# Altium PCB HV_DCDC.PcbDoc
Units mil, origin at the board's own origin, x right, y up, seen from the top; angles counter-clockwise.
Board outline 6000 x 4000 mil, 2 copper layers (Top Layer, Bottom Layer); 25 components, 72 nets, 127 pads, 14 vias.
Unrouted connection lines stored in the file: 42.
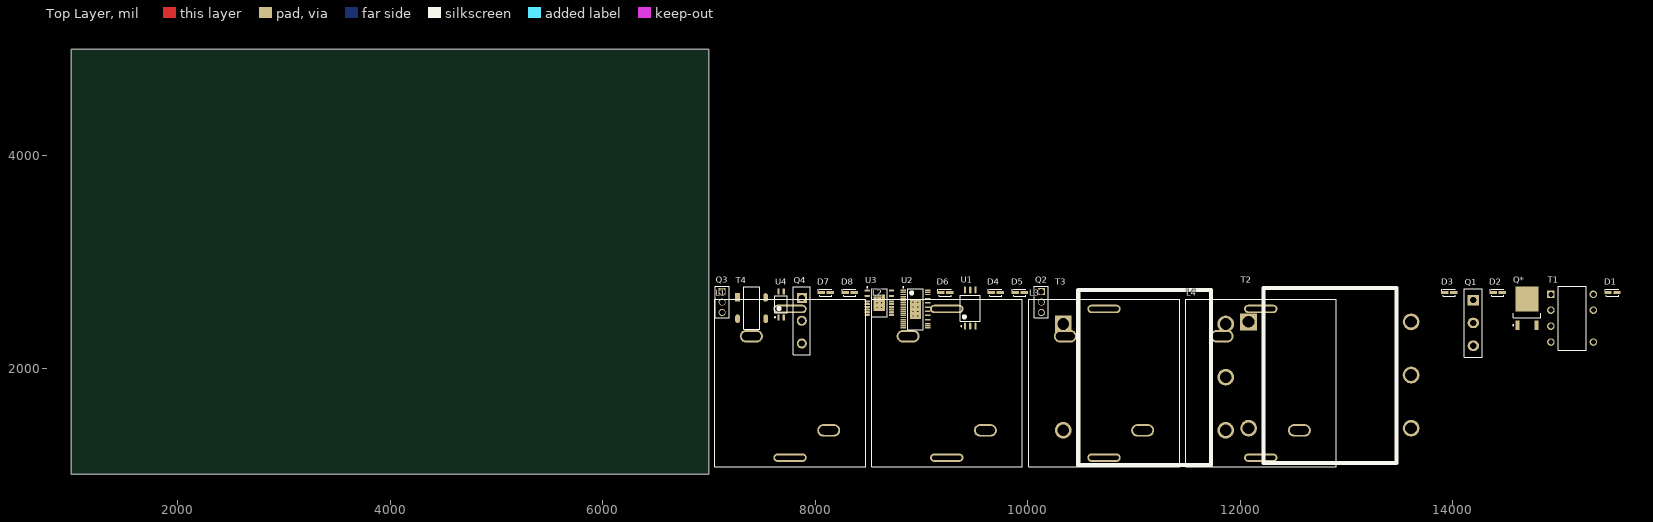
[diagram p0: Top Layer view]
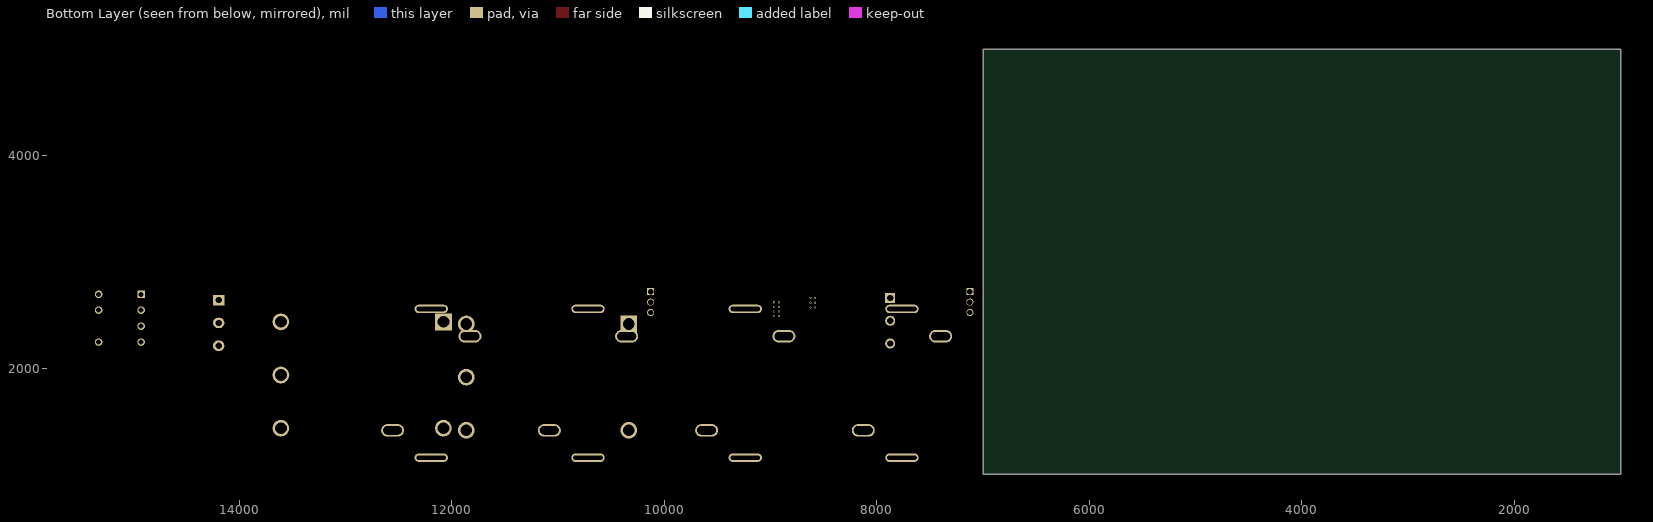
[diagram p1: Bottom Layer view, seen from below]

## Layer stack, top to bottom
Top Solder: solder mask 0.4, Solder Resist, Dk 3.5
Top Layer: signal copper 1.4
Dielectric 1: dielectric 12.6, FR-4, Dk 4.8
Bottom Layer: signal copper 1.4
Bottom Solder: solder mask 0.4, Solder Resist, Dk 3.5

## Board outline
1000,1000 7000,1000 7000,5000 1000,5000

## Design rules (kind name [scope] priority, off if disabled: settings)
Clearance [All] p1: gap=10 ignorepadtopadclearanceinfootprint=FALSE except(0: Arc-Hole Track-Hole SMDPad-Hole THPad-Hole Via-Hole Fill-Hole Poly-Hole Region-Hole Text-Hole)
PolygonConnect [All] p1: connectstyle=Relief reliefconductorwidth=10 reliefentries=4 polygonreliefangle="90 Angle" airgapwidth=10
RoomDefinition Main [InComponentClass('Main')] p1: confinementstyle=ConfineIn formatcopy=TRUE lockcomponents=FALSE outline 220,110 2220,110 2220,1110 220,1110
RoutingVias [All] p1: holewidth=28 width=50 viastyle="Through Hole" minholewidth=28 minwidth=50 maxholewidth=28 maxwidth=50
SolderMaskExpansion [All] p1: expansion=4 istentingtop=FALSE
Width [All] p1: maxlimit=10 minlimit=10 preferedwidth=10
30 further rules are at their usual default settings.

## Components (designator, comment, footprint, x,y, rotation, side; value= is the part's Value field where it differs from the comment)
D1 "BAT46WH" DIOM2715X18N 15505,2710 r0 top
D2 "BAT46WH" DIOM2715X18N 14425,2710 r0 top
D3 "BAT46WH" DIOM2715X18N 13970,2710 r0 top
D4 "BAT46WH" DIOM2715X18N 9700,2710 r0 top
D5 "BAT46WH" DIOM2715X18N 9925,2710 r0 top
D6 "BAT46WH" DIOM2715X18N 9225,2710 r0 top
D7 "BAT46WH" DIOM2715X18N 8100,2710 r0 top
D8 "BAT46WH" DIOM2715X18N 8325,2710 r0 top
L1 "AGP4233-153ME" "AGP4233-153ME Landing Pattern" 7400,2300 r0 top
L2 "P4233-153ME" "AGP4233-153ME Landing Pattern" 8875,2300 r0 top
L3 "AGP4233-153ME" "AGP4233-153ME Landing Pattern" 10355,2300 r0 top
L4 "AGP4233-153ME" "AGP4233-153ME Landing Pattern" 11830,2300 r0 top
Q1 "IXFK240N25X3" TO-264-3 14195,2640 r0 top
Q2 "STF7N105K5" TO-220-3 10130,2720 r0 top
Q3 "IPP019N08NF2SAKMA1" TO-220-3 7125,2720 r0 top
Q4 "UJ3C120150K3S" TO-247-3 7875,2660 r0 top
Q* "STD2NK100Z" "DPAK TO-252" 14700,2565 r90 top
T1 "750817020" "750817020 Transformer" 14925,2695 r0 top
T2 "R41-AC-2202" "R41-AC-2202 Landing Pattern" 12080,2435 r0 top
T3 "R41-AC-2202" "R41-AC-2202 Landing Pattern" 10335,2415 r0 top
T4 "PE-68386NLT" "PE-68386NL Landing Pattern" 7270,2665 r0 top
U1 "ACPL-P346-000E" "SOP-6 Stretched" 9460,2565 r90 top
U2 "LT3752EFE-1#PBF" TSSOP127P600-8N 8945,2555 r0 top
U3 "LT8311EFE#PBF" "TSSOP 20 Lead LT8311" 8605,2615 r0 top
U4 "PS2801C-1-V-F3-A" SSOP127P700X200-4L 7680,2600 r90 top

## Footprints (in the part's own frame and the unit in brackets; to place one, negate y for a bottom-side part, rotate by r counter-clockwise, add the part's x,y. Pads: shape width x height; smd on the part's side, far side on the other; paste and mask are expansions set on the pad)
"750817020 Transformer" [mm]
  rect 1.8x1.8 hole 1.2: 1(0,0)
  round 1.8 hole 1.2: 2(0,-3.81) 3(0,-7.62) 4(0,-11.43) 5(10.16,-11.43) 7(10.16,-3.81) 8(10.16,0)
  silkscreen extent 1.73,-13.33 8.43,1.91
"AGP4233-153ME Landing Pattern" [mm] "Coilcraft AGP4233 Series 6.8uH-150uH"
  oval 8x2 hole 1 slot 7 at 0 deg: 0(9.25,-29.03) 0(9.25,6.53)
  oval 5.5x3 hole 2 slot 4.5 at 0 deg: 1(0,0) 2(18.5,-22.5)
  silkscreen extent -8.7,-31.2 27.3,8.8
DIOM2715X18N [mm] "Molded Diode, 2-Leads, Body 2,70x1,55mm, IPC Medium Density"
  rect 1.75x0.7 smd: 1(-1.075,0) 2(1.075,0)
  silkscreen extent -1.9,-0.85 1.45,0.85, body extent -1.65,-0.85 1.65,0.85, height 1.8
"DPAK TO-252" [mm] "DPAK High density"
  rect 2.3x0.95 smd: 1(-4.1,2.29) 2(-4.1,-2.29)
  rect 6x5.45 smd: 3(2.2,0)
  silkscreen extent -4.22,-3.3 -1.2,3.44, body extent -2.35,-3.3 3.85,3.3, height 2.4
"PE-68386NL Landing Pattern" [mil]
  rect 45x80 smd: 1(0,0)
  oval 45x80 smd: 3(0,-200) 4(265,-200) 6(265,0)
  silkscreen extent 58,-300 208,100
"R41-AC-2202 Landing Pattern" [mm]
  rect 4x4 hole 2.8: 1(0,0)
  round 4 hole 2.8: 5(0,-25.4) 6(38.85,-25.4) 7(38.85,-12.7) 8(38.85,0)
  silkscreen extent 3.6,-33.7 35.35,8.1
"SOP-6 Stretched" [mm] "ACPL-P346"
  oval 1.65x0.55 smd: 1(-4.325,1.27) 2(-4.325,0) 3(-4.325,-1.27) 4(4.325,-1.27) 5(4.325,0) 6(4.325,1.27)
  silkscreen extent -4.45,-2.4 3.1,2.4, body extent -3.5,-2.4 3.5,2.4, height 3.3
SSOP127P700X200-4L [mm] "SSOP, 4-Leads, Body 2,70x4,40mm, Pitch 1,27mm, IPC High Density"
  rect 1.4x0.55 smd: 1(-3.1,0.635) 2(-3.1,-0.635) 3(3.1,-0.635) 4(3.1,0.635)
  silkscreen extent -3.22,-1.5 2,1.58, body extent -2.2,-1.5 2.2,1.5, height 2
TO-220-3 [mm]
  rect 1.7x1.7 hole 1.3: 1(0,0)
  round 1.7 hole 1.3: 2(0,-2.5) 3(0,-5)
  silkscreen extent -1.68,-6.25 1.68,1.25
TO-247-3 [mm]
  rect 2.4x2.4 hole 1.5: 1(0,0)
  round 2.4 hole 1.5: 2(0,-5.44) 3(0,-10.88)
  silkscreen extent -2.03,-13.6 2.03,2.72
TO-264-3 [mm]
  rect 2.7x2.5 / inner rect 2.5x2.5 / far side rect 2.7x2.5 hole 1.5: 1(0,0)
  oval 2.7x2.5 / inner round 2.5 / far side oval 2.7x2.5 hole 1.5: 2(0,-5.46) 3(0,-10.92)
  silkscreen extent -2.18,-13.65 2.18,2.73
TSSOP127P600-8N [mm] "TSSOP 38 Lead LT 3752-1 w. missing Leads for Spacing"
  rect 1.25x0.35 smd: 1(-2.925,4.5) 2(-2.925,4) 3(-2.925,3.5) 4(-2.925,3) 5(-2.925,2.5) 6(-2.925,2) 7(-2.925,1.5) 8(-2.925,1) 9(-2.925,0.5) 10(-2.925,0) 11(-2.925,-0.5) 12(-2.925,-1) 13(-2.925,-1.5) 14(-2.925,-2) 15(-2.925,-2.5) 16(-2.925,-3) 17(-2.925,-3.5) 18(-2.925,-4) 19(-2.925,-4.5) 20(2.925,-4.5) 21(2.925,-4) 22(2.925,-3.5) 24(2.925,-2.5) 26(2.925,-1.5) 28(2.925,-0.5) 30(2.925,0.5) 32(2.925,1.5) 34(2.925,2.5) 36(2.925,3.5) 37(2.925,4) 38(2.925,4.5)
  rect 2.74x4.75 smd: 39(0,0)
  silkscreen extent -3.05,-4.9 1.9,5.35, body extent -2.25,-4.9 2.25,4.9, height 1.2
"TSSOP 20 Lead LT8311" [mm] "TSSOP 20 Lead LT8311 with missing pins for clearance"
  oval 1.3x0.5 smd: 1(-2.9,2.925) 3(-2.9,1.625) 5(-2.9,0.325) 6(-2.9,-0.325) 7(-2.9,-0.975) 8(-2.9,-1.625) 9(-2.9,-2.275) 10(-2.9,-2.925) 11(2.9,-2.925) 12(2.9,-2.275) 13(2.9,-1.625) 14(2.9,-0.975) 15(2.9,-0.325) 16(2.9,0.325) 18(2.9,1.625) 20(2.9,2.925)
  rect 2.74x3.86 smd: 21(0,0)
  silkscreen extent -3.02,-3.3 1.85,3.85, body extent -2.25,-3.3 2.25,3.3, height 1.2

## Part data
L1 L3 L4: "Power inductor, shielded, 20% tol, RoHS, halogen-free", Case/Package=Radial, DC Resistance (DCR)=2.95mR, Inductance=15uH, Inductance Tolerance=20%, Manufacturer=Coilcraft, RMS Current (Irms)=34A, Saturation Current=45A, Category=Inductors, ComponentLink1Description=http://www.farnell.com/datasheets/2017963.pdf?src-supplier=Element14, ComponentLink1URL=http://www.farnell.com/datasheets/2017963.pdf?src-supplier=Element14, Manufacturer Part Number=AGP4233-153ME, Pricing 1="1=15,62000, 10=15,61000, 50=15,61000, 100=15,61000, 1000=11,98000, 10000=11,98000 (USD)", REACH SVHC=Unknown, RoHS=Yes, RoHS Compliant=Yes, Stock 1=17, Supplier 1=Mouser
L2: library part AGP4233-153ME, "Power inductor, shielded, 20% tol, RoHS, halogen-free", Case/Package=Radial, DC Resistance (DCR)=2.95mR, Inductance=15uH, Inductance Tolerance=20%, Manufacturer=Coilcraft, RMS Current (Irms)=34A, Saturation Current=45A, Category=Inductors, ComponentLink1Description=http://www.farnell.com/datasheets/2017963.pdf?src-supplier=Element14, ComponentLink1URL=http://www.farnell.com/datasheets/2017963.pdf?src-supplier=Element14, Manufacturer Part Number=AGP4233-153ME, Pricing 1="1=15,62000, 10=15,61000, 50=15,61000, 100=15,61000, 1000=11,98000, 10000=11,98000 (USD)", REACH SVHC=Unknown, RoHS=Yes, RoHS Compliant=Yes, Stock 1=17, Supplier 1=Mouser
Q1: "Mosfet N-ch 250V 240A TO264", Manufacturer=IXYS, Manufacturer Part Number=IXFK240N25X3, Pricing 1="1=30,00000, 10=27,67000, 50=25,40000, 100=24,04000, 1000=24,04000, 10000=24,04000 (USD)", RoHS=No, Stock 1=7, Supplier 1=Mouser
Q2: "N-channel 1050 V, 1.4 Ohm typ., 4 A MDmesh K5 Power MOSFETs in TO-220FP package", Case/Package=TO-220-3, Continuous Drain Current (ID)=4A, Drain to Source Voltage (Vdss)=1.05kV, Input Capacitance=380pF, Manufacturer=STMicroelectronics, Max Operating Temperature=150°C, Max Power Dissipation=25W, Min Operating Temperature=-55°C, Category=MOSFETs, ComponentLink1Description=http://www.mouser.com/ds/2/389/stf7n105k5-955843.pdf?src-supplier=Mouser, ComponentLink1URL=http://www.mouser.com/ds/2/389/stf7n105k5-955843.pdf?src-supplier=Mouser, ComponentLink2Description=http://www.st.com/content/ccc/resource/technical/document/datasheet/26/20/d1/f7/b4/c1/4c/55/DM00112886.pdf/files/DM00112886.pdf/jcr:content/translations/en.DM00112886.pdf?src-supplier=Digi-Key, ComponentLink2URL=http://www.st.com/content/ccc/resource/technical/document/datasheet/26/20/d1/f7/b4/c1/4c/55/DM00112886.pdf/files/DM00112886.pdf/jcr:content/translations/en.DM00112886.pdf?src-supplier=Digi-Key, ComponentLink3Description=http://www.st.com/st-web-ui/static/active/en/resource/technical/document/datasheet/DM00112886.pdf?src-supplier=Avnet, ComponentLink3URL=http://www.st.com/st-web-ui/static/active/en/resource/technical/document/datasheet/DM00112886.pdf?src-supplier=Avnet, ComponentLink4Description=http://www.farnell.com/datasheets/2371890.pdf?src-supplier=Newark, ComponentLink4URL=http://www.farnell.com/datasheets/2371890.pdf?src-supplier=Newark, Lead Free="Lead Free", Manufacturer Part Number=STF7N105K5, Mount="Through Hole", Packaging=Rail/Tube, Pricing 1="1=3,16000, 10=2,71000, 100=2,16000, 500=1,87000, 1000=1,61000 (USD)", Rds On Max=2R, RoHS=Yes, RoHS Compliant=Yes, Stock 1=996, Supplier 1=Newark
Q3: "Transistor Power MOSFET N-Channel 80V 191A 3-Pin TO-220 Tube", Manufacturer=Infineon, Category=Uncategorized, Manufacturer Part Number=IPP019N08NF2SAKMA1, Pricing 1="1=3,34000, 10=2,99500, 100=2,45420, 500=2,09760 (USD)", RoHS=No, Stock 1=760, Supplier 1=Digi-Key
Q4: "Sicfet N-ch 1200V 18.4A TO247-3", Manufacturer=UnitedSiC, Manufacturer Part Number=UJ3C120150K3S, Pricing 1="1=9,16000, 10=8,28000, 50=7,90000, 100=7,90000, 1000=5,96000, 10000=5,15000 (USD)", RoHS=No, Stock 1=697, Supplier 1=Mouser
Q*: "N-channel 1000 V, 6.25 Ohm typ., 1.85 A, Zener-protected SuperMESH Power MOSFET in DPAK package", Case/Package=DPAK, Continuous Drain Current (ID)=1.85A, Drain to Source Breakdown Voltage=1kV, Drain to Source Resistance=8.5R, Gate to Source Voltage (Vgs)=30V, Input Capacitance=499pF, Manufacturer=STMicroelectronics, Max Operating Temperature=150°C, Max Power Dissipation=70W, Min Operating Temperature=-55°C, Package Quantity=2500, Threshold Voltage=3.75V, Category=MOSFETs, ComponentLink1Description=https://datasheet.ciiva.com/8025/1561863-8025045.pdf?src-supplier=Element14, ComponentLink1URL=https://datasheet.ciiva.com/8025/1561863-8025045.pdf?src-supplier=Element14, ComponentLink2Description=https://datasheet.ciiva.com/25625/0900766b810e895b-25625259.pdf?src-supplier=RSComponents, ComponentLink2URL=https://datasheet.ciiva.com/25625/0900766b810e895b-25625259.pdf?src-supplier=RSComponents, ComponentLink3Description=https://datasheet.ciiva.com/938/cd00159991-938647.pdf?src-supplier=Digi-Key, ComponentLink3URL=https://datasheet.ciiva.com/938/cd00159991-938647.pdf?src-supplier=Digi-Key, ComponentLink4Description=https://datasheet.ciiva.com/6380/cd00159991-6380217.pdf?src-supplier=Digi-Key, ComponentLink4URL=https://datasheet.ciiva.com/6380/cd00159991-6380217.pdf?src-supplier=Digi-Key, ComponentLink5Description=https://datasheet.ciiva.com/16220/cd00159991-16220233.pdf?src-supplier=Future+Electronics, ComponentLink5URL=https://datasheet.ciiva.com/16220/cd00159991-16220233.pdf?src-supplier=Future+Electronics, ComponentLink6Description=https://datasheet.ciiva.com/6380/cd00159991-6380219.pdf?src-supplier=Digi-Key, ComponentLink6URL=https://datasheet.ciiva.com/6380/cd00159991-6380219.pdf?src-supplier=Digi-Key, Contact Plating=Tin,Matte, Drain to Source Voltage (Vdss)=1kV, Drain-source On Resistance-Max=8.5R, Element Configuration=Single, Height=2.4mm, Lead Free="Lead Free", Length=6.6mm, Manufacturer Part Number=STD2NK100Z, Mount="Surface Mount", Number of Elements=1, Number of Pins=3, On-State Resistance=8.5R, Packaging="Tape and Reel", Polarity=N-CHANNEL, Power Dissipation=70W, Pricing 1="1=2,45000, 10=2,19600, 100=1,76550, 500=1,45048, 1000=1,31862 (USD)", Radiation Hardening=No, Rds On Max=8.5R, REACH SVHC="No SVHC", RoHS=Yes, RoHS Compliant=Yes, Series=SuperMESH™, Stock 1=2365, Supplier 1=Digi-Key, Turn-Off Delay Time=41.5ns, Turn-On Delay Time=7.2ns, Width=6.2mm
T1: "WE Transformer"
T2 T3: "High Voltage Transformer"
T4: "Pulse Transformer 1: 1 1500VDC 0.6Ohm Prim. DCR 0.6Ohm Sec. DCR 6 Terminal SMD Automotive", DC Resistance (DCR)=600mR, Manufacturer=Pulse, Max Operating Temperature=130°C, Min Operating Temperature=-40°C, Package Quantity=1500, Category=Transformers, ComponentLink1Description=https://datasheet.ciiva.com/29632/spm2007-61-29632613.pdf?src-supplier=Digi-Key, ComponentLink1URL=https://datasheet.ciiva.com/29632/spm2007-61-29632613.pdf?src-supplier=Digi-Key, ComponentLink2Description=https://datasheet.ciiva.com/29632/+spm2007-61-29632614.pdf?src-supplier=Digi-Key, ComponentLink2URL=https://datasheet.ciiva.com/29632/+spm2007-61-29632614.pdf?src-supplier=Digi-Key, ComponentLink3Description=https://datasheet.ciiva.com/2939/+spm2007-61-2939805.pdf?src-supplier=Digi-Key, ComponentLink3URL=https://datasheet.ciiva.com/2939/+spm2007-61-2939805.pdf?src-supplier=Digi-Key, Depth=8.64mm, Height=2.5mm, Length=6.73mm, Manufacturer Part Number=PE-68386NLT, Mount="Surface Mount", Number of Pins=6, Packaging="Tape and Reel", Pricing 1="1=2,70000, 10=2,16000, 25=1,75520, 50=1,71000, 100=1,66500, 250=1,62000, 500=1,60650 (USD)", Primary Impedance=600mR, Radiation Hardening=No, RoHS=Yes, RoHS Compliant=Yes, Secondary Impedance=600mR, Shielding=Unshielded, Stock 1=13846, Supplier 1=Digi-Key, Termination=SMD/SMT, Turns Ratio=1:1, Weight=0.009877oz, Width=6.7mm
U1: "Logic IC Output Optocoupler, 1-Element, 3750V Isolation", Case/Package=SOIC, Forward Current=4mA, Forward Voltage=1.55V, High Level Output Current=2A, Input Current=11mA, Isolation Voltage=3.75kV, Manufacturer="Broadcom Avago", Max Input Current=25mA, Max Operating Temperature=105°C, Max Output Current=2.5A, Max Power Dissipation=550mW, Min Operating Temperature=-40°C, Operating Supply Voltage=20V, Output Current=1A, Package Quantity=100, Approvals=CSA,UR,UL,IEC, Category=Optocouplers, Fall Time=8ns, Low Level Output Current=2A, Manufacturer Part Number=ACPL-P346-000E, Mount="Surface Mount", Number of Channels=1, Number of Pins=6, Output Voltage=20V, Packaging=Rail/Tube, Pricing 1="1=5,00000, 10=3,53300, 100=2,89340, 500=2,43922, 1000=2,38050 (USD)", Propagation Delay=120ns, Pulse Width Distortion (PWD)=50ns, Radiation Hardening=No, REACH SVHC="No SVHC", Rise Time=8ns, RoHS=Yes, RoHS Compliant=Yes, Stock 1=1063, Supplier 1=Digi-Key, Turn-On Delay Time=120ns
U2: "Current Mode PWM Controller 100kHz to 500kHz Automotive 31-Pin TSSOP EP Tube", Case/Package=TSSOP, Frequency=500kHz, Manufacturer="Analog Devices / Linear Technology", Max Operating Temperature=125°C, Max Supply Voltage=16V, Min Operating Temperature=-40°C, Min Supply Voltage=10.5V, Supplier Part Number 1=LT3752EFE-1#PBF-ND, Category="Voltage Regulators - Switching", Clock Sync=Yes, ComponentLink1Description=https://datasheet.ciiva.com/46429/1841069-46429096.pdf?src-supplier=Element14, ComponentLink1URL=https://datasheet.ciiva.com/46429/1841069-46429096.pdf?src-supplier=Element14, Manufacturer Part Number=LT3752EFE-1#PBF, Max Duty Cycle=95%, Number of Output Phases=1, Number of Outputs=1, Number of Pins=38, Packaging=Rail/Tube, Pricing 1="1=8,12000, 10=7,33800, 25=6,99720, 100=6,07550, 250=5,80244, 500=5,31300 (USD)", REACH SVHC="No SVHC", RoHS=Yes, RoHS Compliant=Yes, Stock 1=108, Supplier 1=Digi-Key, Switching Frequency=500kHz, Synchronous Rectifier=Yes, Topology="Forward Converter"
U3: "LT8311 - Synchronous Rectifier Controller with Opto-Coupler Driver for Forward Converters", Case/Package=TSSOP, Manufacturer="Analog Devices / Linear Technology", Max Operating Temperature=150°C, Max Supply Voltage=30V, Min Operating Temperature=-40°C, Min Supply Voltage=3.7V, Operating Supply Current=4.5mA, Package Quantity=74, Category="Gate Drivers", ComponentLink1Description=https://datasheet.ciiva.com/46423/1810721-46423691.pdf?src-supplier=Element14, ComponentLink1URL=https://datasheet.ciiva.com/46423/1810721-46423691.pdf?src-supplier=Element14, ComponentLink2Description=https://datasheet.ciiva.com/29699/44625-29699311.pdf?src-supplier=Digi-Key, ComponentLink2URL=https://datasheet.ciiva.com/29699/44625-29699311.pdf?src-supplier=Digi-Key, Manufacturer Part Number=LT8311EFE#PBF, Mount="Surface Mount", Number of Pins=20, Packaging=Rail/Tube, Pricing 1="1=7,34000, 10=6,63200, 25=6,32360, 100=5,49060, 250=5,24384, 500=4,80150 (USD)", REACH SVHC="No SVHC", RoHS=Yes, RoHS Compliant=Yes, Supplier 1=Digi-Key
U4: "Optocoupler DC-IN 1-CH Transistor DC-OUT 4-Pin SSOP Embossed T/R", Case/Package=SOIC, Collector Emitter Voltage (VCEO)=300mV, Manufacturer=CEL, Output Current per Channel=30mA, Output Voltage=80V, Package Quantity=3500, Category=Optocouplers, Collector-emitter Voltage-Max=300mV, ComponentLink1Description=https://datasheet.ciiva.com/2088/ps2801c-1-ps2801c-4-2088034.pdf?src-supplier=Digi-Key, ComponentLink1URL=https://datasheet.ciiva.com/2088/ps2801c-1-ps2801c-4-2088034.pdf?src-supplier=Digi-Key, Input Type=DC, Lead Free="Lead Free", Manufacturer Part Number=PS2801C-1-V-F3-A, Mount="Surface Mount", Number of Channels=1, Packaging="Tape and Reel", RoHS=Yes, Series=NEPOC, Supplier 1=Digi-Key
D1 D2 D3 D4 D5 D6 D7 D8: Supplier 1=Mouser

## Via types
v1: diameter 19.68, hole 7.87, Top Layer to Bottom Layer, 14 vias

## Nets (pads, with @x,y where several pads share a name; then routed paths per layer and width w, separated by ;. In a path a pad name is that pad's centre, name@x,y a point inside that pad or via, vN(x,y) a via of type N, cw(c..) or ccw(c..) an arc to the next point about the centre after c; other vN are vias at no path point)
!PGOOD: U3.13
+24: L4.2
AOUT: D4.2 U2.32
CG: Q1.1 U3.16
COMP: U2.5
CSN: U3.18
CSP: U3.20
FB_HV: U2.4
FG: Q3.1 U3.5
GND: Q3.3 T1.5 T1.7 T4.3 T4.4 U2.18 U2.19 U2.20 U2.38 U2.39 U3.1 U3.3 U3.21 U4.2
  other v1: 8923.35,2490.04 8966.65,2490.04 8923.35,2533.35 8966.65,2533.35 8583.35,2571.69 8626.65,2571.69 8923.35,2576.65 8966.65,2576.65 8583.35,2615 8626.65,2615 8923.35,2619.96 8966.65,2619.96 8583.35,2658.31 8626.65,2658.31
HFB: U2.1
HI_SENSE: U2.36
HOUT: Q*.1 U2.34
HVIN+: T2.1 T3.1
HVIN+_FIL: T1.1
INTVCC: D8.1 U2.26
NetC1_2: D1.2
NetC3_2: D2.2
NetC5_2: D3.2
NetC9_1: Q2.2
NetC9_2: 
NetC13_1: D6.2 Q2.1
NetC13_2: U1.5
NetC14_1: D5.2 U1.6
NetC16_1: 
NetC16_2: U2.2
NetC17_1: U2.7
NetC21_1: U3.14
NetC23_1: 
NetC23_2: U3.10
NetC25_1: U2.17
NetC26_1: U3.11
NetC27_2: T4.1
NetD1_1: D1.1 Q*.2 T1.3
NetD2_1: D2.1 T1.8
NetD3_1: D3.1 T1.4
NetD4_1: D4.1 U1.1
NetD5_1: D5.1
NetD7_1: D7.1
NetL1_1: L1.1 Q1.2 T2.8
NetL1_2: L1.2 L2.1
NetL2_2: L2.2 L3.1
NetL3_2: L3.2 L4.1
NetQ1_3: Q1.3
NetQ3_2: Q3.2 T3.6
NetQ4_1: Q4.1
NetQ4_3: Q4.3
NetQ*_3: Q*.3
NetR17_2: U1.3
NetR19_1: U2.3
NetR20_2: U2.9
NetR22_1: U2.8
NetR23_2: U2.10
NetR24_1: U2.24
NetR26_1: U2.11
NetR27_1: U4.3
NetR30_1: U2.12
NetR31_2: U2.22
NetR33_1: U2.13
NetR34_2: U4.4
NetR35_1: U4.1
NetR35_2: U3.9
NetR36_1: U2.21
NetR37_1: U3.12
NetR38_1: U2.14
NetR43_1: T4.6
NetT2_6: T2.6 T3.8
SOUT: U2.30
SWP: D6.1 Q2.3 Q4.2 T2.5 T3.5 U1.4
SYNC: U3.15
V_AUX: U3.6 U3.7 U3.8
VIN_LT3: D7.2 D8.2 U2.28
pads on no net: L1.0 L2.0 L3.0 L4.0 T1.2 T2.7 T3.7 U1.2 U2.6 U2.15 U2.16 U2.37